# EAGLE board IOB-Turtle_array (EAGLE 7.7.0)
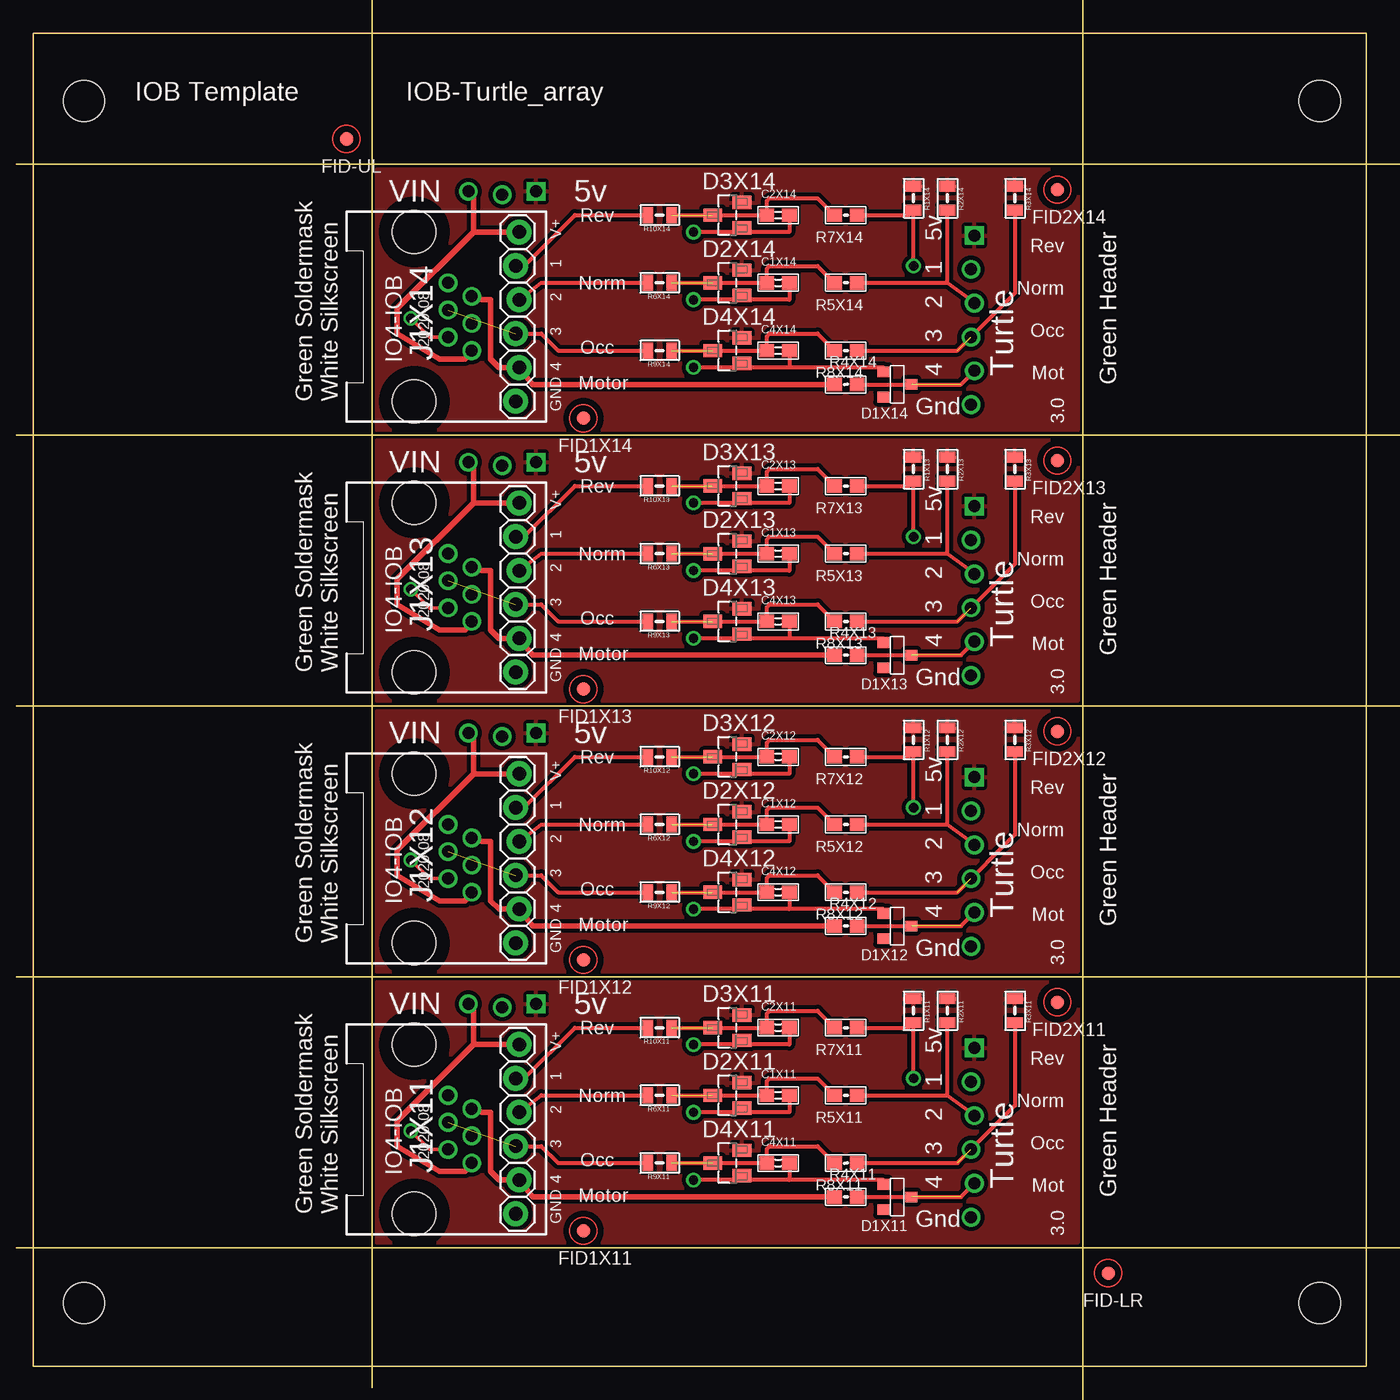
[diagram p0: board, top side]
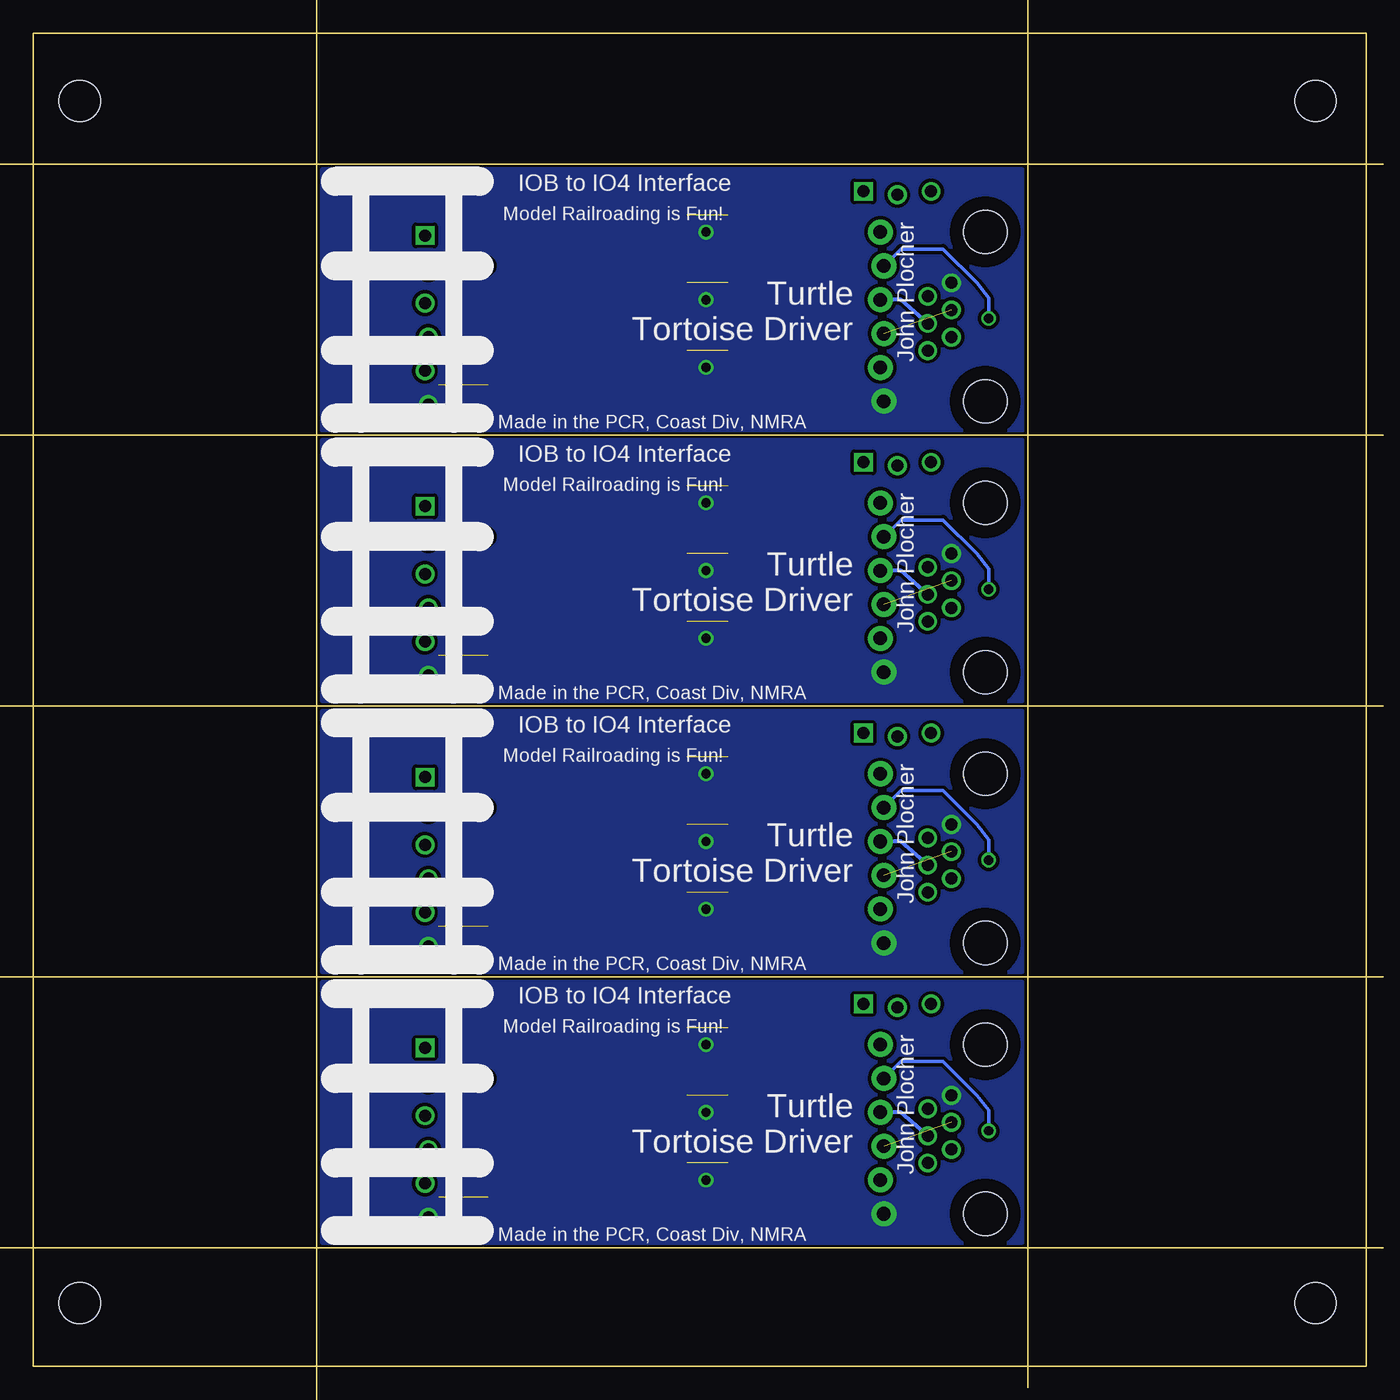
[diagram p1: board, bottom side, seen from below]

Size 100 x 100 mm. Coordinates in mm from the lower left corner, seen from the top.
Copper layers (1*16): Top 0.035mm / dielectric 1.5mm / Bottom 0.035mm
Design rules "default": minimum track width 10mil, minimum drill 0.6mm, track to track 8mil, track to pad 8mil, pad to pad 8mil, via to via 8mil, smd to smd 8mil, copper to edge 40mil, drill to drill 8mil, minimum pad ring 10mil, minimum via ring 8mil, stop-mask expansion 4mil, vias tented up to drill 0mil, thermal gap 10mil
Milling: 5 lines

## Footprints (pad centres in the part's own frame; a part is rotated, then mirrored left to right if it is on the bottom)
0603-CAP = smd 1.1 x 1: 1 -0.85,0; 2 0.85,0
SOT23-3 = smd 0.9 x 0.8: 1 1,-0.95; 2 1,0.95; 3 -1.1,0
SOT23 = smd 1.4 x 1: 1 1.1,-0.95; 2 1.1,0.95; 3 -1.1,0
FIDUCIAL_1MM = smd 1 x 1: 1 0,0
RJ24-INVERTED-PINS = drill 1.016 pad 1.88: 1 6.35,-4.064; 2 3.81,-3.81; 3 1.27,-4.064; 4 -1.27,-3.81; 5 -3.81,-4.064; 6 -6.35,-3.81 | drill 0.9 pad 1.4: 1@1 -2.54,-0.508; 2@1 -1.524,1.27; 3@1 -0.508,-0.508; 4@1 0.508,1.27; 5@1 1.524,-0.508; 6@1 2.54,1.27 | hole 3.251: 6.35,3.81; -6.35,3.81
0805-RES = smd 0.8 x 1.2: 1 -0.9,0; 2 0.9,0
0603-RES = smd 1.1 x 1: 1 -0.85,0; 2 0.85,0
BOARD-DINRAIL-3.17IN-H4X-IOB = hole 3.1: 96.52,94.92; 96.52,4.75; 3.81,94.92; 3.81,4.75
IO4-IOB = drill 0.9: G@3 44.958,2.286; P1 44.958,12.446; P2 45.212,9.906; P3 44.958,7.366; P4 45.212,4.826; V+ 7.239,18.288; VOUT 9.779,18.034 | drill 0.9 square: V5 12.319,18.288; V5@1 45.212,14.986

## Placement (x,y rotation side)
C1X11  0.01uF  [0603-CAP]  55.88,20.32 0 top
C1X12  0.01uF  [0603-CAP]  55.88,40.64 0 top
C1X13  0.01uF  [0603-CAP]  55.88,60.96 0 top
C1X14  0.01uF  [0603-CAP]  55.88,81.28 0 top
C2X11  0.01uF  [0603-CAP]  55.88,25.4 0 top
C2X12  0.01uF  [0603-CAP]  55.88,45.72 0 top
C2X13  0.01uF  [0603-CAP]  55.88,66.04 0 top
C2X14  0.01uF  [0603-CAP]  55.88,86.36 0 top
C4X11  0.01uF  [0603-CAP]  55.88,15.24 0 top
C4X12  0.01uF  [0603-CAP]  55.88,35.56 0 top
C4X13  0.01uF  [0603-CAP]  55.88,55.88 0 top
C4X14  0.01uF  [0603-CAP]  55.88,76.2 0 top
D1X11  4.7v  [SOT23-3]  64.77,12.7 180 top
D1X12  4.7v  [SOT23-3]  64.77,33.02 180 top
D1X13  4.7v  [SOT23-3]  64.77,53.34 180 top
D1X14  4.7v  [SOT23-3]  64.77,73.66 180 top
D2X11  BAT54S  [SOT23]  52.07,20.32 0 top
D2X12  BAT54S  [SOT23]  52.07,40.64 0 top
D2X13  BAT54S  [SOT23]  52.07,60.96 0 top
D2X14  BAT54S  [SOT23]  52.07,81.28 0 top
D3X11  BAT54S  [SOT23]  52.07,25.4 0 top
D3X12  BAT54S  [SOT23]  52.07,45.72 0 top
D3X13  BAT54S  [SOT23]  52.07,66.04 0 top
D3X14  BAT54S  [SOT23]  52.07,86.36 0 top
D4X11  BAT54S  [SOT23]  52.07,15.24 0 top
D4X12  BAT54S  [SOT23]  52.07,35.56 0 top
D4X13  BAT54S  [SOT23]  52.07,55.88 0 top
D4X14  BAT54S  [SOT23]  52.07,76.2 0 top
FID1X11  FIDUCIAL  [FIDUCIAL_1MM]  41.27,10.16 0 top
FID1X12  FIDUCIAL  [FIDUCIAL_1MM]  41.27,30.48 0 top
FID1X13  FIDUCIAL  [FIDUCIAL_1MM]  41.27,50.8 0 top
FID1X14  FIDUCIAL  [FIDUCIAL_1MM]  41.27,71.12 0 top
FID2X11  FIDUCIAL  [FIDUCIAL_1MM]  76.83,27.3 0 top
FID2X12  FIDUCIAL  [FIDUCIAL_1MM]  76.83,47.62 0 top
FID2X13  FIDUCIAL  [FIDUCIAL_1MM]  76.83,67.94 0 top
FID2X14  FIDUCIAL  [FIDUCIAL_1MM]  76.83,88.27 0 top
FID-LR  FIDUCIAL  [FIDUCIAL_1MM]  80.64,6.99 0 top
FID-UL  FIDUCIAL  [FIDUCIAL_1MM]  23.5,92.08 0 top
J1X11  RJ12/6  [RJ24-INVERTED-PINS]  32.38,17.78 90 top
J1X12  RJ12/6  [RJ24-INVERTED-PINS]  32.38,38.1 90 top
J1X13  RJ12/6  [RJ24-INVERTED-PINS]  32.38,58.42 90 top
J1X14  RJ12/6  [RJ24-INVERTED-PINS]  32.38,78.74 90 top
R1X11  10k  [0805-RES]  66.04,26.67 270 top
R1X12  10k  [0805-RES]  66.04,46.99 270 top
R1X13  10k  [0805-RES]  66.04,67.31 270 top
R1X14  10k  [0805-RES]  66.04,87.63 270 top
R2X11  10k  [0805-RES]  68.58,26.67 270 top
R2X12  10k  [0805-RES]  68.58,46.99 270 top
R2X13  10k  [0805-RES]  68.58,67.31 270 top
R2X14  10k  [0805-RES]  68.58,87.63 270 top
R3X11  10k  [0805-RES]  73.66,26.67 270 top
R3X12  10k  [0805-RES]  73.66,46.99 270 top
R3X13  10k  [0805-RES]  73.66,67.31 270 top
R3X14  10k  [0805-RES]  73.66,87.63 270 top
R4X11  1K0  [0603-RES]  60.96,12.7 0 top
R4X12  1K0  [0603-RES]  60.96,33.02 0 top
R4X13  1K0  [0603-RES]  60.96,53.34 0 top
R4X14  1K0  [0603-RES]  60.96,73.66 0 top
R5X11  1K0  [0603-RES]  60.96,20.32 180 top
R5X12  1K0  [0603-RES]  60.96,40.64 180 top
R5X13  1K0  [0603-RES]  60.96,60.96 180 top
R5X14  1K0  [0603-RES]  60.96,81.28 180 top
R6X11  82R  [0805-RES]  46.99,20.32 180 top
R6X12  82R  [0805-RES]  46.99,40.64 180 top
R6X13  82R  [0805-RES]  46.99,60.96 180 top
R6X14  82R  [0805-RES]  46.99,81.28 180 top
R7X11  1K0  [0603-RES]  60.96,25.4 180 top
R7X12  1K0  [0603-RES]  60.96,45.72 180 top
R7X13  1K0  [0603-RES]  60.96,66.04 180 top
R7X14  1K0  [0603-RES]  60.96,86.36 180 top
R8X11  1K0  [0603-RES]  60.96,15.24 180 top
R8X12  1K0  [0603-RES]  60.96,35.56 180 top
R8X13  1K0  [0603-RES]  60.96,55.88 180 top
R8X14  1K0  [0603-RES]  60.96,76.2 180 top
R9X11  82R  [0805-RES]  46.99,15.24 180 top
R9X12  82R  [0805-RES]  46.99,35.56 180 top
R9X13  82R  [0805-RES]  46.99,55.88 180 top
R9X14  82R  [0805-RES]  46.99,76.2 180 top
R10X11  82R  [0805-RES]  46.99,25.4 180 top
R10X12  82R  [0805-RES]  46.99,45.72 180 top
R10X13  82R  [0805-RES]  46.99,66.04 180 top
R10X14  82R  [0805-RES]  46.99,86.36 180 top
U$1X1  [BOARD-DINRAIL-3.17IN-H4X-IOB]  0,0 0 top
U$1X11  CONNECTOR-IO4-IOBBARE  [IO4-IOB]  25.4,8.89 0 top
U$1X12  CONNECTOR-IO4-IOBBARE  [IO4-IOB]  25.4,29.21 0 top
U$1X13  CONNECTOR-IO4-IOBBARE  [IO4-IOB]  25.4,49.53 0 top
U$1X14  CONNECTOR-IO4-IOBBARE  [IO4-IOB]  25.4,69.85 0 top

## Library data of the parts
C1X11-C1X14 C2X11-C2X14 C4X11-C4X14 D1X11-D1X14 D2X11-D2X14 D3X11-D3X14 D4X11-D4X14 FID1X11-FID1X14 FID2X11-FID2X14 FID-LR FID-UL J1X11-J1X14 R1X11-R1X14 R2X11-R2X14 R3X11-R3X14 R4X11-R4X14 R5X11-R5X14 R6X11-R6X14 R7X11-R7X14 R8X11-R8X14 R9X11-R9X14 R10X11-R10X14 U$1X1 U$1X11-U$1X14 = SPCoast

## Nets
!NORMX11: R2X11.2 R5X11.1 U$1X11.P2
!NORMX12: R2X12.2 R5X12.1 U$1X12.P2
!NORMX13: R2X13.2 R5X13.1 U$1X13.P2
!NORMX14: R2X14.2 R5X14.1 U$1X14.P2
!OCCX11: R3X11.2 R8X11.1 U$1X11.P3
!OCCX12: R3X12.2 R8X12.1 U$1X12.P3
!OCCX13: R3X13.2 R8X13.1 U$1X13.P3
!OCCX14: R3X14.2 R8X14.1 U$1X14.P3
!REVX11: R1X11.2 R7X11.1 U$1X11.P1
!REVX12: R1X12.2 R7X12.1 U$1X12.P1
!REVX13: R1X13.2 R7X13.1 U$1X13.P1
!REVX14: R1X14.2 R7X14.1 U$1X14.P1
GNDX11: C1X11.2 C2X11.2 C4X11.2 D1X11.1 D2X11.1 D3X11.1 D4X11.1 J1X11.6 J1X11.6@1 U$1X11.G@3
GNDX12: C1X12.2 C2X12.2 C4X12.2 D1X12.1 D2X12.1 D3X12.1 D4X12.1 J1X12.6 J1X12.6@1 U$1X12.G@3
GNDX13: C1X13.2 C2X13.2 C4X13.2 D1X13.1 D2X13.1 D3X13.1 D4X13.1 J1X13.6 J1X13.6@1 U$1X13.G@3
GNDX14: C1X14.2 C2X14.2 C4X14.2 D1X14.1 D2X14.1 D3X14.1 D4X14.1 J1X14.6 J1X14.6@1 U$1X14.G@3
IO4-2X11: J1X11.2 J1X11.2@1 R10X11.2
IO4-2X12: J1X12.2 J1X12.2@1 R10X12.2
IO4-2X13: J1X13.2 J1X13.2@1 R10X13.2
IO4-2X14: J1X14.2 J1X14.2@1 R10X14.2
IO4-3X11: J1X11.3 J1X11.3@1 R6X11.2
IO4-3X12: J1X12.3 J1X12.3@1 R6X12.2
IO4-3X13: J1X13.3 J1X13.3@1 R6X13.2
IO4-3X14: J1X14.3 J1X14.3@1 R6X14.2
IO4-5X11: J1X11.5 J1X11.5@1 R4X11.1
IO4-5X12: J1X12.5 J1X12.5@1 R4X12.1
IO4-5X13: J1X13.5 J1X13.5@1 R4X13.1
IO4-5X14: J1X14.5 J1X14.5@1 R4X14.1
N$1X11: J1X11.4 J1X11.4@1 R9X11.2
N$1X12: J1X12.4 J1X12.4@1 R9X12.2
N$1X13: J1X13.4 J1X13.4@1 R9X13.2
N$1X14: J1X14.4 J1X14.4@1 R9X14.2
N$2X11: C1X11.1 D2X11.3 R5X11.2 R6X11.1
N$2X12: C1X12.1 D2X12.3 R5X12.2 R6X12.1
N$2X13: C1X13.1 D2X13.3 R5X13.2 R6X13.1
N$2X14: C1X14.1 D2X14.3 R5X14.2 R6X14.1
N$3X11: C2X11.1 D3X11.3 R7X11.2 R10X11.1
N$3X12: C2X12.1 D3X12.3 R7X12.2 R10X12.1
N$3X13: C2X13.1 D3X13.3 R7X13.2 R10X13.1
N$3X14: C2X14.1 D3X14.3 R7X14.2 R10X14.1
N$14X11: C4X11.1 D4X11.3 R8X11.2 R9X11.1
N$14X12: C4X12.1 D4X12.3 R8X12.2 R9X12.1
N$14X13: C4X13.1 D4X13.3 R8X13.2 R9X13.1
N$14X14: C4X14.1 D4X14.3 R8X14.2 R9X14.1
P4X11: D1X11.3 R4X11.2 U$1X11.P4
P4X12: D1X12.3 R4X12.2 U$1X12.P4
P4X13: D1X13.3 R4X13.2 U$1X13.P4
P4X14: D1X14.3 R4X14.2 U$1X14.P4
VCCIOX11: J1X11.1 J1X11.1@1 U$1X11.V+
VCCIOX12: J1X12.1 J1X12.1@1 U$1X12.V+
VCCIOX13: J1X13.1 J1X13.1@1 U$1X13.V+
VCCIOX14: J1X14.1 J1X14.1@1 U$1X14.V+
VCCX11: D2X11.2 D3X11.2 D4X11.2 R1X11.1 R2X11.1 R3X11.1 U$1X11.V5 U$1X11.V5@1
VCCX12: D2X12.2 D3X12.2 D4X12.2 R1X12.1 R2X12.1 R3X12.1 U$1X12.V5 U$1X12.V5@1
VCCX13: D2X13.2 D3X13.2 D4X13.2 R1X13.1 R2X13.1 R3X13.1 U$1X13.V5 U$1X13.V5@1
VCCX14: D2X14.2 D3X14.2 D4X14.2 R1X14.1 R2X14.1 R3X14.1 U$1X14.V5 U$1X14.V5@1

## Tracks (layer width: path | path; a pad name or v marks a point on that pad's centre or on a via)
!NORMX11
  Top 0.305: R5X11.1 68.58,20.32 | 68.58,20.32 R2X11.2 | 68.58,20.32 70.36,19.05 U$1X11.P2
!NORMX12
  Top 0.305: R5X12.1 68.58,40.64 | 68.58,40.64 R2X12.2 | 68.58,40.64 70.36,39.37 U$1X12.P2
!NORMX13
  Top 0.305: R5X13.1 68.58,60.96 | 68.58,60.96 R2X13.2 | 68.58,60.96 70.36,59.69 U$1X13.P2
!NORMX14
  Top 0.305: R5X14.1 68.58,81.28 | 68.58,81.28 R2X14.2 | 68.58,81.28 70.36,80.01 U$1X14.P2
!OCCX11  (1 unrouted)
  Top 0.305: R8X11.1 69.34,15.24 73.66,19.56 R3X11.2
!OCCX12  (1 unrouted)
  Top 0.305: R8X12.1 69.34,35.56 73.66,39.88 R3X12.2
!OCCX13  (1 unrouted)
  Top 0.305: R8X13.1 69.34,55.88 73.66,60.2 R3X13.2
!OCCX14  (1 unrouted)
  Top 0.305: R8X14.1 69.34,76.2 73.66,80.52 R3X14.2
!REVX11  (via drill 0.7 pad 1.11)
  Top 0.305: v66.04,21.59 R1X11.2 65.67,25.4 R7X11.1
  Bottom 0.305: v66.04,21.59 70.1,21.59 U$1X11.P1
!REVX12  (via drill 0.7 pad 1.11)
  Top 0.305: v66.04,41.91 R1X12.2 65.67,45.72 R7X12.1
  Bottom 0.305: v66.04,41.91 70.1,41.91 U$1X12.P1
!REVX13  (via drill 0.7 pad 1.11)
  Top 0.305: v66.04,62.23 R1X13.2 65.67,66.04 R7X13.1
  Bottom 0.305: v66.04,62.23 70.1,62.23 U$1X13.P1
!REVX14  (via drill 0.7 pad 1.11)
  Top 0.305: v66.04,82.55 R1X14.2 65.67,86.36 R7X14.1
  Bottom 0.305: v66.04,82.55 70.1,82.55 U$1X14.P1
GNDX11  (via drill 0.7 pad 1.11)
  Top 0.305: 53.49,13.97 D4X11.1 53.19,13.97 | 56.73,13.97 63.77,13.97 D1X11.1 | 56.73,13.97 53.19,13.97 | v49.53,19.05 53.17,19.05 D2X11.1 53.34,19.05 56.73,19.05 C1X11.2 | v49.53,24.13 53.17,24.13 D3X11.1 53.34,24.13 56.73,24.13 C2X11.2 | 53.19,13.97 v49.53,13.97 | C4X11.2 56.73,13.97
  pour Bottom (isolate 0.254, no thermals): 25.78,9.27 25.78,28.83 78.36,28.83 78.36,9.27
GNDX12  (via drill 0.7 pad 1.11)
  Top 0.305: 53.49,34.29 D4X12.1 53.19,34.29 | 56.73,34.29 63.77,34.29 D1X12.1 | 56.73,34.29 53.19,34.29 | v49.53,39.37 53.17,39.37 D2X12.1 53.34,39.37 56.73,39.37 C1X12.2 | v49.53,44.45 53.17,44.45 D3X12.1 53.34,44.45 56.73,44.45 C2X12.2 | 53.19,34.29 v49.53,34.29 | C4X12.2 56.73,34.29
  pour Bottom (isolate 0.254, no thermals): 25.78,29.59 25.78,49.15 78.36,49.15 78.36,29.59
GNDX13  (via drill 0.7 pad 1.11)
  Top 0.305: 53.49,54.61 D4X13.1 53.19,54.61 | 56.73,54.61 63.77,54.61 D1X13.1 | 56.73,54.61 53.19,54.61 | v49.53,59.69 53.17,59.69 D2X13.1 53.34,59.69 56.73,59.69 C1X13.2 | v49.53,64.77 53.17,64.77 D3X13.1 53.34,64.77 56.73,64.77 C2X13.2 | 53.19,54.61 v49.53,54.61 | C4X13.2 56.73,54.61
  pour Bottom (isolate 0.254, no thermals): 25.78,49.91 25.78,69.47 78.36,69.47 78.36,49.91
GNDX14  (via drill 0.7 pad 1.11)
  Top 0.305: 53.49,74.93 D4X14.1 53.19,74.93 | 56.73,74.93 63.77,74.93 D1X14.1 | 56.73,74.93 53.19,74.93 | v49.53,80.01 53.17,80.01 D2X14.1 53.34,80.01 56.73,80.01 C1X14.2 | v49.53,85.09 53.17,85.09 D3X14.1 53.34,85.09 56.73,85.09 C2X14.2 | 53.19,74.93 v49.53,74.93 | C4X14.2 56.73,74.93
  pour Bottom (isolate 0.254, no thermals): 25.78,70.23 25.78,89.79 78.36,89.79 78.36,70.23
IO4-2X11  (via drill 0.7 pad 1.11)
  Top 0.254: v28.32,17.65 29.72,16.26 J1X11.2@1
  Top 0.305: J1X11.2 36.83,21.59 40.64,25.4 R10X11.2
  Bottom 0.254: J1X11.2 34.92,22.86 31.75,22.86 29.21,20.32 28.32,19.18 v28.32,17.65
IO4-2X12  (via drill 0.7 pad 1.11)
  Top 0.254: v28.32,37.97 29.72,36.58 J1X12.2@1
  Top 0.305: J1X12.2 36.83,41.91 40.64,45.72 R10X12.2
  Bottom 0.254: J1X12.2 34.92,43.18 31.75,43.18 29.21,40.64 28.32,39.5 v28.32,37.97
IO4-2X13  (via drill 0.7 pad 1.11)
  Top 0.254: v28.32,58.29 29.72,56.9 J1X13.2@1
  Top 0.305: J1X13.2 36.83,62.23 40.64,66.04 R10X13.2
  Bottom 0.254: J1X13.2 34.92,63.5 31.75,63.5 29.21,60.96 28.32,59.82 v28.32,58.29
IO4-2X14  (via drill 0.7 pad 1.11)
  Top 0.254: v28.32,78.61 29.72,77.22 J1X14.2@1
  Top 0.305: J1X14.2 36.83,82.55 40.64,86.36 R10X14.2
  Bottom 0.254: J1X14.2 34.92,83.82 31.75,83.82 29.21,81.28 28.32,80.14 v28.32,78.61
IO4-3X11
  Top 0.305: J1X11.3 38.1,20.32 R6X11.2
  Bottom 0.305: J1X11.3@1 34.92,19.05 J1X11.3
IO4-3X12
  Top 0.305: J1X12.3 38.1,40.64 R6X12.2
  Bottom 0.305: J1X12.3@1 34.92,39.37 J1X12.3
IO4-3X13
  Top 0.305: J1X13.3 38.1,60.96 R6X13.2
  Bottom 0.305: J1X13.3@1 34.92,59.69 J1X13.3
IO4-3X14
  Top 0.305: J1X14.3 38.1,81.28 R6X14.2
  Bottom 0.305: J1X14.3@1 34.92,80.01 J1X14.3
IO4-5X11
  Top 0.406: R4X11.1 37.47,12.7 J1X11.5 34.92,13.97 34.29,14.61 34.29,19.05 33.66,19.05 J1X11.5@1
IO4-5X12
  Top 0.406: R4X12.1 37.47,33.02 J1X12.5 34.92,34.29 34.29,34.92 34.29,39.37 33.66,39.37 J1X12.5@1
IO4-5X13
  Top 0.406: R4X13.1 37.47,53.34 J1X13.5 34.92,54.61 34.29,55.24 34.29,59.69 33.66,59.69 J1X13.5@1
IO4-5X14
  Top 0.406: R4X14.1 37.47,73.66 J1X14.5 34.92,74.93 34.29,75.56 34.29,80.01 33.66,80.01 J1X14.5@1
N$1X11  (1 unrouted)
  Top 0.305: J1X11.4 38.1,16.51 39.37,15.24 R9X11.2
N$1X12  (1 unrouted)
  Top 0.305: J1X12.4 38.1,36.83 39.37,35.56 R9X12.2
N$1X13  (1 unrouted)
  Top 0.305: J1X13.4 38.1,57.15 39.37,55.88 R9X13.2
N$1X14  (1 unrouted)
  Top 0.305: J1X14.4 38.1,77.47 39.37,76.2 R9X14.2
N$2X11  (1 unrouted)
  Top 0.305: R6X11.1 C1X11.1 55.03,21.38 55.24,21.59 58.84,21.59 R5X11.2
N$2X12  (1 unrouted)
  Top 0.305: R6X12.1 C1X12.1 55.03,41.7 55.24,41.91 58.84,41.91 R5X12.2
N$2X13  (1 unrouted)
  Top 0.305: R6X13.1 C1X13.1 55.03,62.02 55.24,62.23 58.84,62.23 R5X13.2
N$2X14  (1 unrouted)
  Top 0.305: R6X14.1 C1X14.1 55.03,82.33 55.24,82.55 58.84,82.55 R5X14.2
N$3X11  (1 unrouted)
  Top 0.305: R10X11.1 C2X11.1 55.03,26.45 55.24,26.67 58.84,26.67 R7X11.2
N$3X12  (1 unrouted)
  Top 0.305: R10X12.1 C2X12.1 55.03,46.77 55.24,46.99 58.84,46.99 R7X12.2
N$3X13  (1 unrouted)
  Top 0.305: R10X13.1 C2X13.1 55.03,67.09 55.24,67.31 58.84,67.31 R7X13.2
N$3X14  (1 unrouted)
  Top 0.305: R10X14.1 C2X14.1 55.03,87.42 55.24,87.63 58.84,87.63 R7X14.2
N$14X11  (1 unrouted)
  Top 0.305: R9X11.1 C4X11.1 55.03,16.3 55.24,16.51 58.84,16.51 R8X11.2
N$14X12  (1 unrouted)
  Top 0.305: R9X12.1 C4X12.1 55.03,36.62 55.24,36.83 58.84,36.83 R8X12.2
N$14X13  (1 unrouted)
  Top 0.305: R9X13.1 C4X13.1 55.03,56.94 55.24,57.15 58.84,57.15 R8X13.2
N$14X14  (1 unrouted)
  Top 0.305: R9X14.1 C4X14.1 55.03,77.25 55.24,77.47 58.84,77.47 R8X14.2
P4X11  (1 unrouted)
  Top 0.305: R4X11.2 69.6,12.7 U$1X11.P4
P4X12  (1 unrouted)
  Top 0.305: R4X12.2 69.6,33.02 U$1X12.P4
P4X13  (1 unrouted)
  Top 0.305: R4X13.2 69.6,53.34 U$1X13.P4
P4X14  (1 unrouted)
  Top 0.305: R4X14.2 69.6,73.66 U$1X14.P4
VCCIOX11
  Top 0.406: J1X11.1@1 32.38,14.61 30.48,14.61 27.3,16.51 27.3,18.41 33.02,24.13 | 33.02,24.13 J1X11.1 | U$1X11.V+ 33.02,26.67 33.02,24.13
VCCIOX12
  Top 0.406: J1X12.1@1 32.38,34.92 30.48,34.92 27.3,36.83 27.3,38.73 33.02,44.45 | 33.02,44.45 J1X12.1 | U$1X12.V+ 33.02,46.99 33.02,44.45
VCCIOX13
  Top 0.406: J1X13.1@1 32.38,55.24 30.48,55.24 27.3,57.15 27.3,59.05 33.02,64.77 | 33.02,64.77 J1X13.1 | U$1X13.V+ 33.02,67.31 33.02,64.77
VCCIOX14
  Top 0.406: J1X14.1@1 32.38,75.56 30.48,75.56 27.3,77.47 27.3,79.38 33.02,85.09 | 33.02,85.09 J1X14.1 | U$1X14.V+ 33.02,87.63 33.02,85.09
VCCX11
  pour Top (isolate 0.305): 25.78,9.27 25.78,28.83 78.36,28.83 78.36,9.27
VCCX12
  pour Top (isolate 0.305): 25.78,29.59 25.78,49.15 78.36,49.15 78.36,29.59
VCCX13
  pour Top (isolate 0.305): 25.78,49.91 25.78,69.47 78.36,69.47 78.36,49.91
VCCX14
  pour Top (isolate 0.305): 25.78,70.23 25.78,89.79 78.36,89.79 78.36,70.23

## Text on the board
tPlace: Rev | Rev | Norm | Norm | Occ | 2020-08 | Occ | IO4-IOB | Mot | Turtle | Green Header | Motor | Green Soldermask / White Silkscreen | 3.0 | Rev | Rev | Norm | Norm | Occ | 2020-08 | Occ | IO4-IOB | Mot | Turtle | Motor | Green Header | Green Soldermask / White Silkscreen | 3.0 | Rev | Rev | Norm | Norm | Occ | 2020-08 | IO4-IOB | Occ | Turtle | Mot | Motor | Green Header | Green Soldermask / White Silkscreen | 3.0 | Rev | Rev | Norm | Norm | Occ | 2020-08 | Occ | IO4-IOB | Mot | Turtle | Green Header | Motor | Green Soldermask / White Silkscreen | 3.0
bPlace: John Plocher | Turtle / Tortoise Driver | John Plocher | Turtle / Tortoise Driver | John Plocher | Turtle / Tortoise Driver | John Plocher | Turtle / Tortoise Driver
_tNames: R1 | R2 | R3 | D3 | C2 | R10 | R7 | D2 | C1 | R6 | R5 | D4 | R8 | R9 | C4 | J1 | R4 | D1 | R1 | R2 | R3 | D3 | C2 | R10 | R7 | D2 | C1 | R5 | R6 | D4 | R8 | R9 | C4 | J1 | R4 | D1 | D3 | R1 | R2 | R3 | C2 | R10 | R7 | D2 | C1 | R6 | R5 | D4 | R8 | R9 | C4 | J1 | R4 | D1 | R1 | R2 | R3 | D3 | C2 | R10 | R7 | D2 | C1 | R6 | R5 | D4 | R8 | R9 | C4 | J1 | R4 | D1